# EAGLE board untitled (EAGLE 9.6.2)
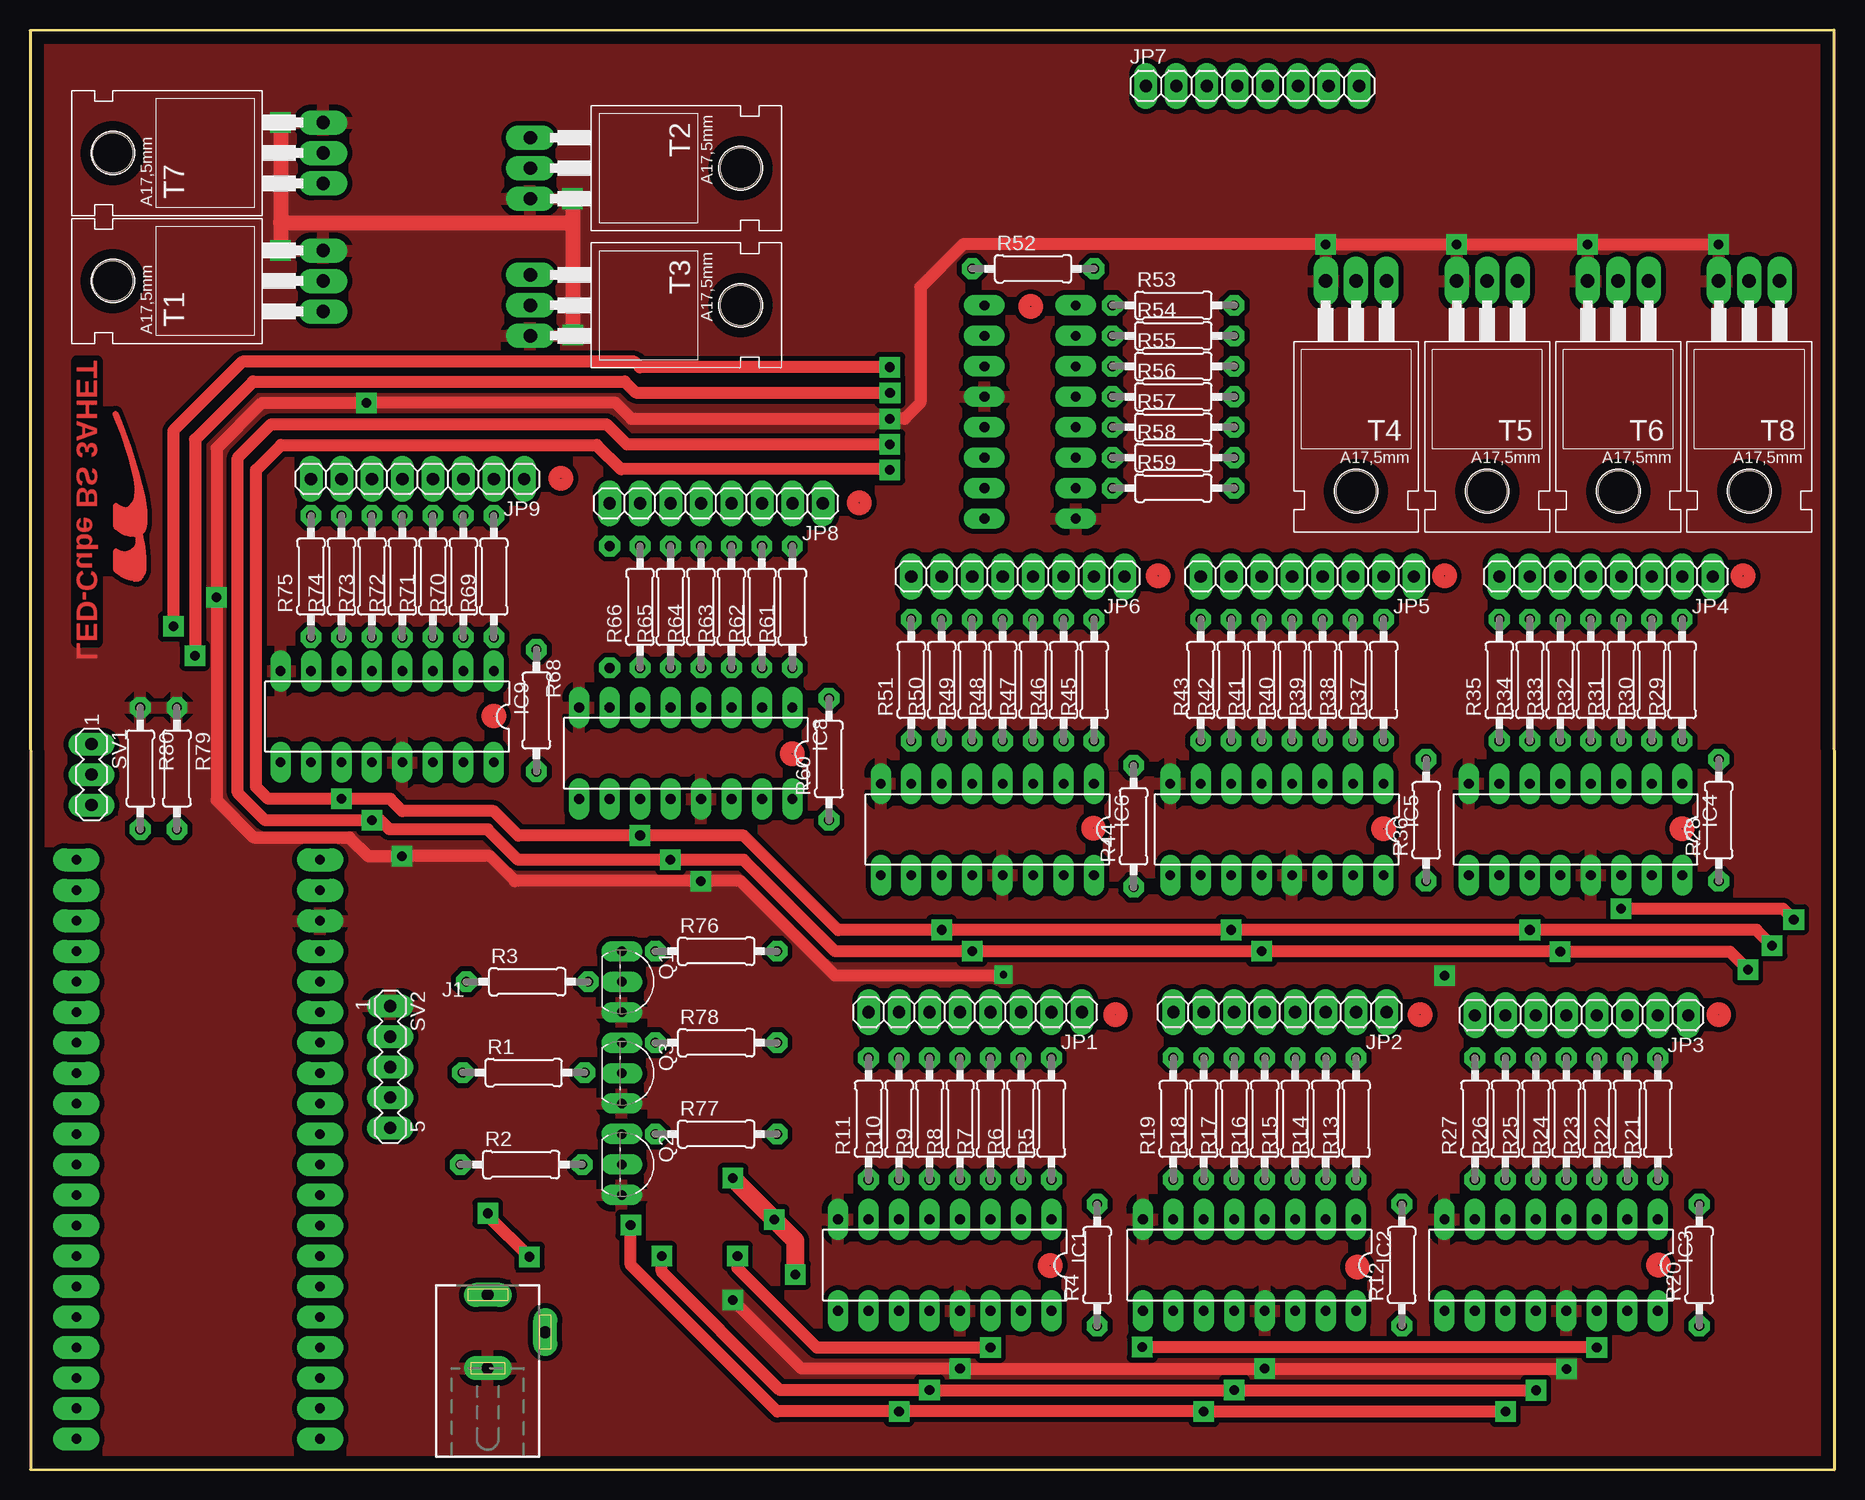
[diagram p0: board, top side]
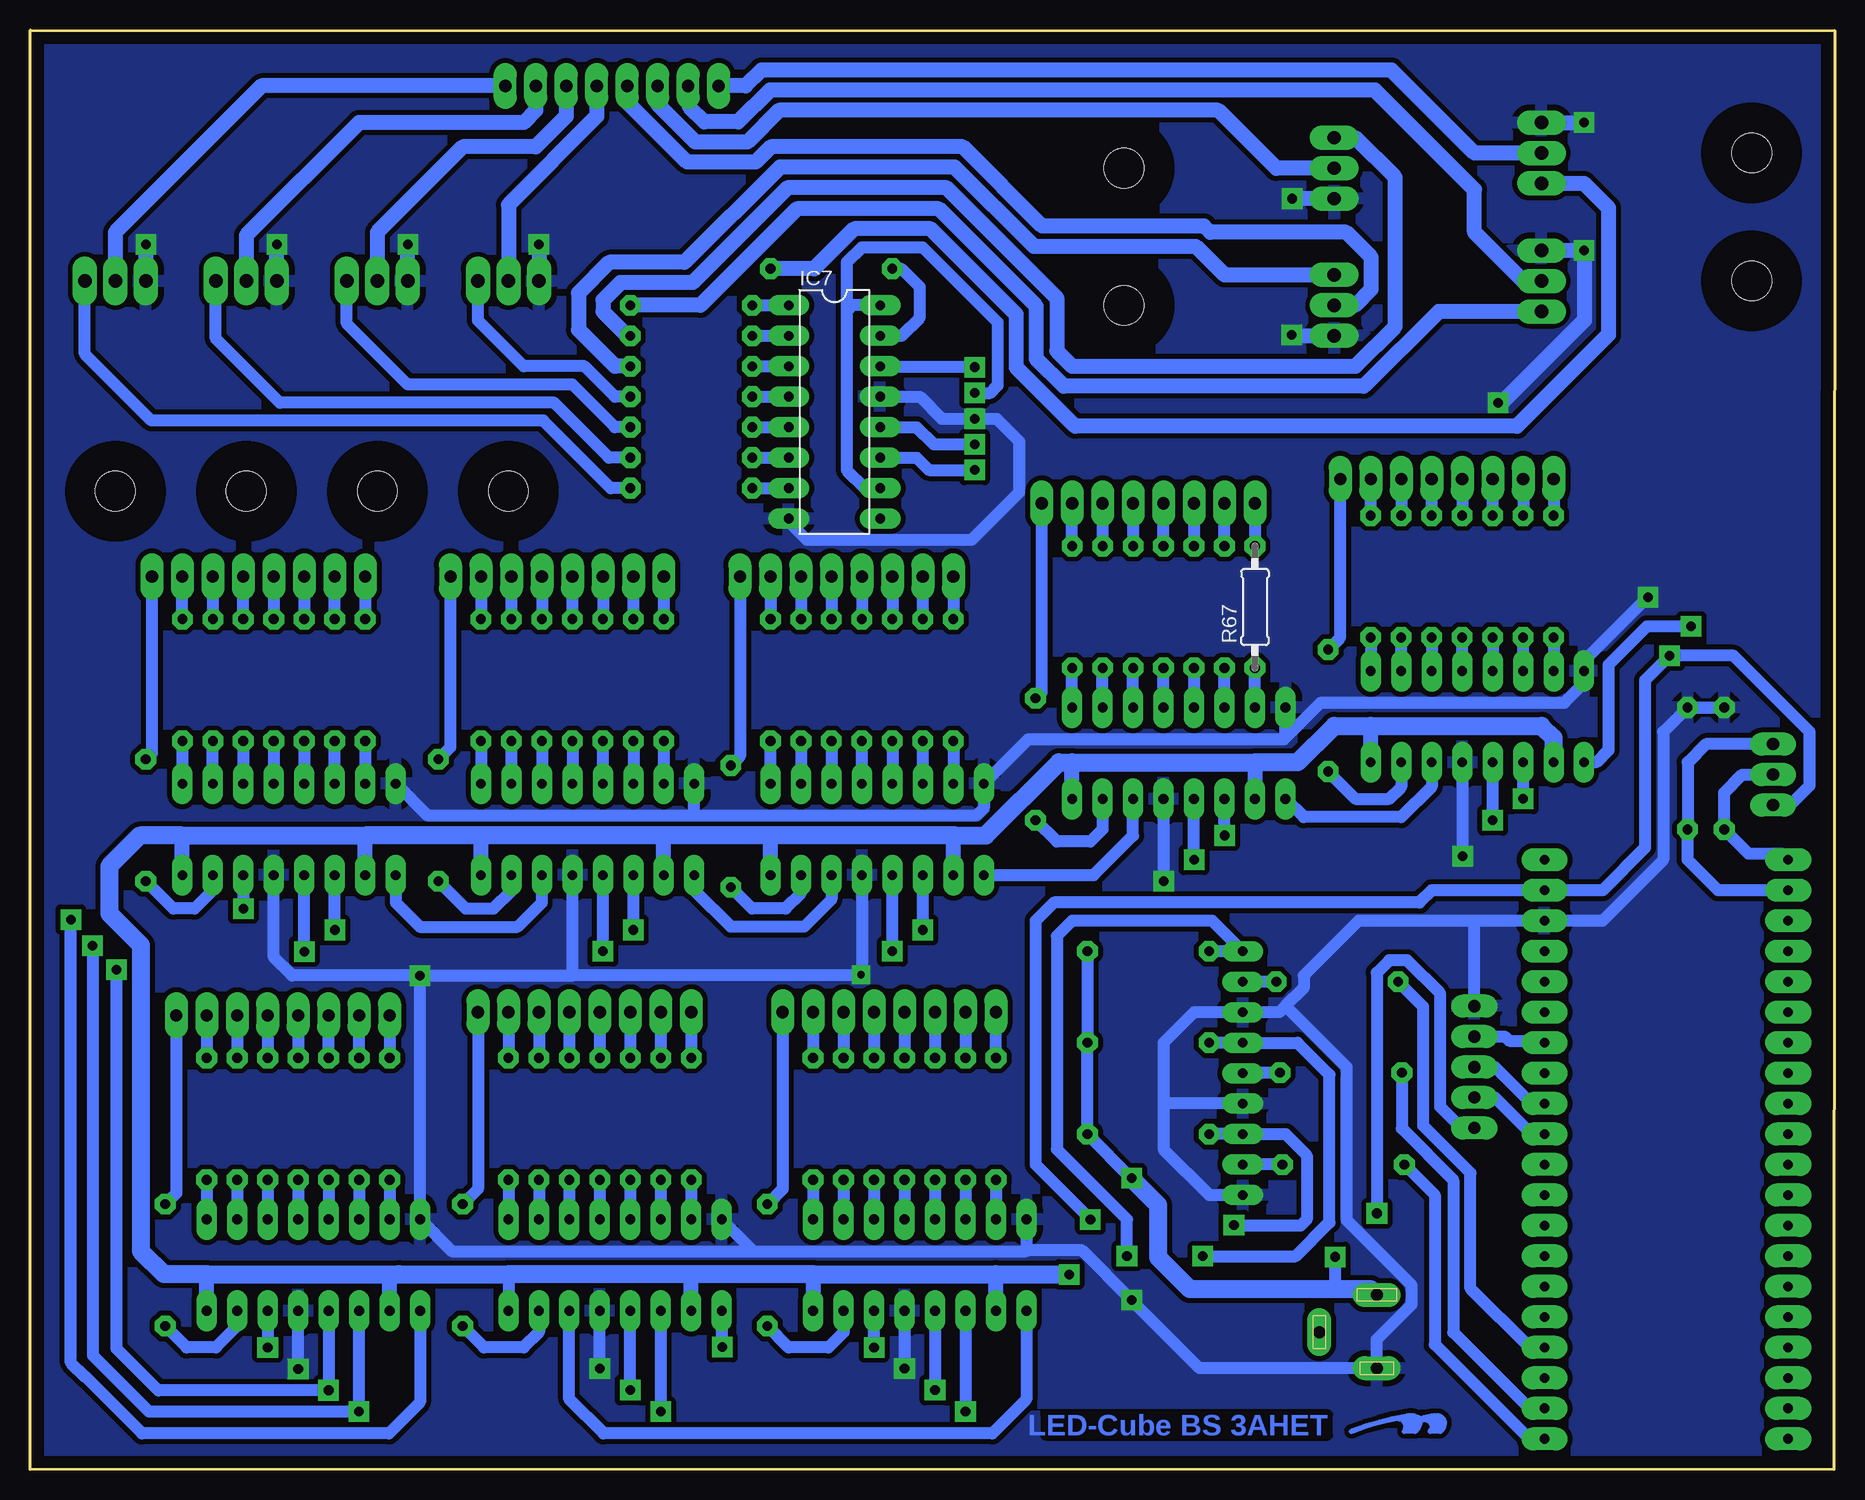
[diagram p1: board, bottom side, seen from below]

Size 150.42 x 120.01 mm. Coordinates in mm from the lower left corner, seen from the top.
Outline: 0.05,0.03 150.42,0 150.39,120.01 0,119.95 0.05,0.03
Copper layers (1*16): Top 0.035mm / dielectric 1.5mm / Bottom 0.035mm
Design rules "default *": minimum track width 16mil, minimum drill 24mil, track to track 16mil, track to pad 16mil, pad to pad 16mil, via to via 16mil, smd to smd 12mil, copper to edge 40mil, drill to drill 6mil, minimum pad ring 18mil, minimum via ring 18mil, stop-mask expansion 4mil, vias tented up to drill 0mil, thermal gap 20mil

## Footprints (pad centres in the part's own frame; a part is rotated, then mirrored left to right if it is on the bottom)
DIL16 = drill 0.813 long: 1 -8.89,-3.81; 2 -6.35,-3.81; 3 -3.81,-3.81; 4 -1.27,-3.81; 5 1.27,-3.81; 6 3.81,-3.81; 7 6.35,-3.81; 8 8.89,-3.81; 9 8.89,3.81; 10 6.35,3.81; 11 3.81,3.81; 12 1.27,3.81; 13 -1.27,3.81; 14 -3.81,3.81; 15 -6.35,3.81; 16 -8.89,3.81
DCJ0202 = drill 1 pad 2 long: 1 0,3.1; 2 4.8,0; 3 0,-3
1X08 = drill 1.016 long: 1 -8.89,0; 2 -6.35,0; 3 -3.81,0; 4 -1.27,0; 5 1.27,0; 6 3.81,0; 7 6.35,0; 8 8.89,0
TO92-EBC = drill 0.813 long: B 0,-1.27; C -2.54,-1.27; E 2.54,-1.27
0207/10 = drill 0.813 octagon: 1 -5.08,0; 2 5.08,0
MA03-1 = drill 1.016 long: 1 -2.54,0; 2 0,0; 3 2.54,0
MA05-1 = drill 1.016 long: 1 -5.08,0; 2 -2.54,0; 3 0,0; 4 2.54,0; 5 5.08,0
TO220 = drill 1.118 long: 1 -2.54,-6.35; 2 0,-6.35; 3 2.54,-6.35 | hole 3.302: 0,11.176
PI_PICO = drill 0.8 pad 1.93 long: 3V3(OUT) 10.16,15.24; 3V3_EN 10.16,17.78; ADC 10.16,12.7; GND1 -10.16,20.32; GND2 -10.16,7.62; GND3 -10.16,-5.08; GND4 -10.16,-17.78; GND5 10.16,-17.78; GND6 10.16,-5.08; GND7 10.16,7.62; GND8 10.16,20.32; GP0 -10.16,25.4; GP1 -10.16,22.86; GP2 -10.16,17.78; GP3 -10.16,15.24; GP4 -10.16,12.7; GP5 -10.16,10.16; GP6 -10.16,5.08; GP7 -10.16,2.54; GP8 -10.16,0; GP9 -10.16,-2.54; GP10 -10.16,-7.62; GP11 -10.16,-10.16; GP12 -10.16,-12.7; GP13 -10.16,-15.24; GP14 -10.16,-20.32; GP15 -10.16,-22.86; GP16 10.16,-22.86; GP17 10.16,-20.32; GP18 10.16,-15.24; GP19 10.16,-12.7; GP20 10.16,-10.16; GP21 10.16,-7.62; GP22 10.16,-2.54; GP26 10.16,2.54; GP27 10.16,5.08; GP28 10.16,10.16; RUN 10.16,0; VBUS 10.16,25.4; VSYS 10.16,22.86

## Placement (x,y rotation side)
IC1  74HC595N  [DIL16]  76.25,17.04 180 top
IC2  74HC595N  [DIL16]  101.65,17.04 180 top
IC3  74HC595N  [DIL16]  126.8,17.04 180 top
IC4  74HC595N  [DIL16]  128.83,53.37 180 top
IC5  74HC595N  [DIL16]  103.94,53.37 180 top
IC6  74HC595N  [DIL16]  79.81,53.37 180 top
IC7  74HC595N  [DIL16]  83.36,88.16 270 bottom
IC8  74HC595N  [DIL16]  54.66,59.72 180 top
IC9  74HC595N  [DIL16]  29.77,62.76 180 top
J1  DCJ0202  [DCJ0202]  38.15,11.46 0 top
JP1  [1X08]  78.79,38.13 180 top
JP2  [1X08]  104.19,38.13 180 top
JP3  [1X08]  129.34,37.87 180 top
JP4  [1X08]  131.37,74.45 180 top
JP5  [1X08]  106.48,74.45 180 top
JP6  [1X08]  82.35,74.45 180 top
JP7  [1X08]  101.9,115.34 0 top
JP8  [1X08]  57.2,80.54 180 top
JP9  [1X08]  32.31,82.58 180 top
Q1  BC447  [TO92-EBC]  50.6,40.67 270 top
Q2  BC447  [TO92-EBC]  50.6,25.43 270 top
Q3  BC447  [TO92-EBC]  50.6,33.05 270 top
R1  [0207/10]  41.15,33.1 0 top
R2  [0207/10]  40.94,25.43 0 top
R3  [0207/10]  41.45,40.67 0 top
R4  [0207/10]  88.95,17.04 90 top
R5  [0207/10]  85.14,29.24 90 top
R6  [0207/10]  82.6,29.24 90 top
R7  [0207/10]  80.06,29.24 90 top
R8  [0207/10]  77.52,29.24 90 top
R9  [0207/10]  74.98,29.24 90 top
R10  [0207/10]  72.44,29.24 90 top
R11  [0207/10]  69.9,29.24 90 top
R12  [0207/10]  114.35,17.04 90 top
R13  [0207/10]  110.54,29.24 90 top
R14  [0207/10]  108,29.24 90 top
R15  [0207/10]  105.46,29.24 90 top
R16  [0207/10]  102.92,29.24 90 top
R17  [0207/10]  100.38,29.24 90 top
R18  [0207/10]  97.84,29.24 90 top
R19  [0207/10]  95.3,29.24 90 top
R20  [0207/10]  139.14,17.04 90 top
R21  [0207/10]  135.69,29.24 90 top
R22  [0207/10]  133.15,29.24 90 top
R23  [0207/10]  130.61,29.24 90 top
R24  [0207/10]  128.07,29.24 90 top
R25  [0207/10]  125.53,29.24 90 top
R26  [0207/10]  122.99,29.24 90 top
R27  [0207/10]  120.45,29.24 90 top
R28  [0207/10]  140.77,54.13 90 top
R29  [0207/10]  137.72,65.81 90 top
R30  [0207/10]  135.18,65.81 90 top
R31  [0207/10]  132.64,65.81 90 top
R32  [0207/10]  130.1,65.81 90 top
R33  [0207/10]  127.56,65.81 90 top
R34  [0207/10]  125.02,65.81 90 top
R35  [0207/10]  122.48,65.81 90 top
R36  [0207/10]  116.38,54.13 90 top
R37  [0207/10]  112.83,65.81 90 top
R38  [0207/10]  110.29,65.81 90 top
R39  [0207/10]  107.75,65.81 90 top
R40  [0207/10]  105.21,65.81 90 top
R41  [0207/10]  102.67,65.81 90 top
R42  [0207/10]  100.13,65.81 90 top
R43  [0207/10]  97.59,65.81 90 top
R44  [0207/10]  92,53.62 90 top
R45  [0207/10]  88.7,65.81 90 top
R46  [0207/10]  86.16,65.81 90 top
R47  [0207/10]  83.62,65.81 90 top
R48  [0207/10]  81.08,65.81 90 top
R49  [0207/10]  78.54,65.81 90 top
R50  [0207/10]  76,65.81 90 top
R51  [0207/10]  73.46,65.81 90 top
R52  [0207/10]  83.62,100.1 0 top
R53  [0207/10]  95.3,97.05 0 top
R54  [0207/10]  95.3,94.51 0 top
R55  [0207/10]  95.3,91.97 0 top
R56  [0207/10]  95.3,89.43 0 top
R57  [0207/10]  95.3,86.89 0 top
R58  [0207/10]  95.3,84.35 0 top
R59  [0207/10]  95.3,81.81 0 top
R60  [0207/10]  66.6,59.21 90 top
R61  [0207/10]  63.55,71.91 90 top
R62  [0207/10]  61.01,71.91 90 top
R63  [0207/10]  58.47,71.91 90 top
R64  [0207/10]  55.93,71.91 90 top
R65  [0207/10]  53.39,71.91 90 top
R66  [0207/10]  50.85,71.91 90 top
R67  [0207/10]  48.31,71.91 90 bottom
R68  [0207/10]  42.21,63.27 90 top
R69  [0207/10]  38.66,74.45 90 top
R70  [0207/10]  36.12,74.45 90 top
R71  [0207/10]  33.58,74.45 90 top
R72  [0207/10]  31.04,74.45 90 top
R73  [0207/10]  28.5,74.45 90 top
R74  [0207/10]  25.96,74.45 90 top
R75  [0207/10]  23.42,74.45 90 top
R76  [0207/10]  57.2,43.21 0 top
R77  [0207/10]  57.2,27.97 0 top
R78  [0207/10]  57.2,35.59 0 top
R79  [0207/10]  12.24,58.45 270 top
R80  [0207/10]  9.19,58.45 270 top
SV1  [MA03-1]  5.13,57.94 270 top
SV2  [MA05-1]  30.02,33.55 270 top
T1  TIP122  [TO220]  18.08,99.09 90 top
T2  TIP122  [TO220]  48.06,108.48 270 top
T3  TIP122  [TO220]  48.06,97.05 270 top
T4  TIP122  [TO220]  110.54,92.74 180 top
T5  TIP122  [TO220]  121.46,92.74 180 top
T6  TIP122  [TO220]  132.38,92.74 180 top
T7  TIP122  [TO220]  18.08,109.75 90 top
T8  TIP122  [TO220]  143.31,92.74 180 top
U$1  [LOGOBOT_8]  36.63,3.07 0 top
U$2  [PI_PICO]  14.02,25.43 0 top
U$3  [LOGOTOP_15]  7.16,79.27 270 top

## Library data of the parts
IC1-IC9 = 74xx-eu
J1 = con-jack; OC_FARNELL: unknown; OC_NEWARK: unknown
JP1-JP9 = pinhead
Q1-Q3 = transistor-npn
R1-R80 = rcl; SPICEPREFIX: R
SV1 SV2 = con-lstb; OC_FARNELL: unknown; OC_NEWARK: unknown
T1-T8 = transistor
U$1 U$3 = HTL-Logo
U$2 = PI_PICO

## Nets
DATA: IC1.14 Q1.C R76.1
GND: IC1.8 IC1.13 IC2.8 IC2.13 IC3.8 IC3.13 IC4.8 IC4.13 IC5.8 IC5.13 IC6.8 IC6.13 IC7.8 IC7.13 IC8.8 IC8.13 IC9.8 IC9.13 J1.3 Q1.E Q2.E Q3.E R79.1 R80.1 SV2.1 T1.3 T2.3 T3.3 T4.3 T5.3 T6.3 T7.3 T8.3 U$2.GND8
N$1: R1.1 U$2.GP17
N$2: Q3.B R1.2
N$3: SV2.4 U$2.GP26
N$4: Q2.B R2.2
N$5: Q1.B R3.2
N$6: R3.1 U$2.GP18
N$7: R2.1 U$2.GP16
N$8: IC1.15 R4.1
N$9: IC1.5 R9.1
N$10: IC1.6 R10.1
N$11: IC1.7 R11.1
N$12: JP1.1 R4.2
N$13: JP1.2 R5.2
N$14: IC1.1 R5.1
N$15: IC1.2 R6.1
N$16: IC1.3 R7.1
N$17: IC1.4 R8.1
N$18: JP1.3 R6.2
N$19: JP1.4 R7.2
N$20: JP1.5 R8.2
N$21: JP1.6 R9.2
N$22: JP1.7 R10.2
N$23: JP1.8 R11.2
N$24: IC2.1 R13.1
N$25: IC2.2 R14.1
N$26: IC2.3 R15.1
N$27: IC2.4 R16.1
N$28: IC1.9 IC2.14
N$29: IC2.15 R12.1
N$30: IC2.5 R17.1
N$31: IC2.6 R18.1
N$32: IC2.7 R19.1
N$33: JP2.1 R12.2
N$34: JP2.2 R13.2
N$35: JP2.3 R14.2
N$36: JP2.4 R15.2
N$37: JP2.5 R16.2
N$38: JP2.6 R17.2
N$39: JP2.7 R18.2
N$40: JP2.8 R19.2
N$41: R80.2 SV1.2 U$2.GP0
N$42: IC2.9 IC3.14
N$43: R79.2 SV1.1 U$2.GP1
N$44: IC3.1 R21.1
N$45: IC3.2 R22.1
N$46: IC3.3 R23.1
N$47: IC3.4 R24.1
N$48: IC3.15 R20.1
N$49: IC3.5 R25.1
N$50: IC3.6 R26.1
N$51: IC3.7 R27.1
N$52: JP3.1 R20.2
N$53: JP3.2 R21.2
N$54: JP3.3 R22.2
N$55: JP3.4 R23.2
N$56: JP3.5 R24.2
N$57: JP3.6 R25.2
N$58: JP3.7 R26.2
N$59: JP3.8 R27.2
N$60: IC7.15 R52.1
N$61: IC3.9 IC4.14
N$62: IC7.1 R53.1
N$63: IC4.1 R29.1
N$64: IC4.2 R30.1
N$65: IC4.3 R31.1
N$66: IC4.4 R32.1
N$67: IC4.15 R28.1
N$68: IC4.5 R33.1
N$69: IC4.6 R34.1
N$70: IC4.7 R35.1
N$71: JP4.1 R28.2
N$72: JP4.2 R29.2
N$73: JP4.3 R30.2
N$74: JP4.4 R31.2
N$75: JP4.5 R32.2
N$76: JP4.6 R33.2
N$77: JP4.7 R34.2
N$78: JP4.8 R35.2
N$79: IC7.2 R54.1
N$80: IC4.9 IC5.14
N$81: IC7.3 R55.1
N$82: IC5.1 R37.1
N$83: IC5.2 R38.1
N$84: IC5.3 R39.1
N$85: IC5.4 R40.1
N$86: IC5.15 R36.1
N$87: IC5.5 R41.1
N$88: IC5.6 R42.1
N$89: IC5.7 R43.1
N$90: JP5.1 R36.2
N$91: JP5.2 R37.2
N$92: JP5.3 R38.2
N$93: JP5.4 R39.2
N$94: JP5.5 R40.2
N$95: JP5.6 R41.2
N$96: JP5.7 R42.2
N$97: JP5.8 R43.2
N$98: IC7.4 R56.1
N$99: IC5.9 IC6.14
N$100: IC7.5 R57.1
N$101: IC6.1 R45.1
N$102: IC6.2 R46.1
N$103: IC6.3 R47.1
N$104: IC6.4 R48.1
N$105: IC6.15 R44.1
N$106: IC6.5 R49.1
N$107: IC6.6 R50.1
N$108: IC6.7 R51.1
N$109: JP6.1 R44.2
N$110: JP6.2 R45.2
N$111: JP6.3 R46.2
N$112: JP6.4 R47.2
N$113: JP6.5 R48.2
N$114: JP6.6 R49.2
N$115: JP6.7 R50.2
N$116: JP6.8 R51.2
N$117: IC7.6 R58.1
N$118: SV2.3 U$2.GP27
N$119: IC7.7 R59.1
N$120: R52.2 T7.1
N$121: R53.2 T1.1
N$122: R54.2 T2.1
N$123: R55.2 T3.1
N$124: R56.2 T4.1
N$125: R57.2 T5.1
N$126: R58.2 T6.1
N$127: R59.2 T8.1
N$128: JP7.1 T7.2
N$129: JP7.2 T1.2
N$130: JP7.3 T2.2
N$131: JP7.4 T3.2
N$132: JP7.5 T4.2
N$133: JP7.6 T5.2
N$134: JP7.7 T6.2
N$135: JP7.8 T8.2
N$136: IC6.9 IC8.14
N$137: IC8.1 R61.1
N$138: IC8.2 R62.1
N$139: IC8.3 R63.1
N$140: IC8.4 R64.1
N$141: IC8.15 R60.1
N$142: IC8.5 R65.1
N$143: IC8.6 R66.1
N$144: IC8.7 R67.1
N$145: JP8.1 R60.2
N$146: JP8.2 R61.2
N$147: JP8.3 R62.2
N$148: JP8.4 R63.2
N$149: JP8.5 R64.2
N$150: JP8.6 R65.2
N$151: JP8.7 R66.2
N$152: JP8.8 R67.2
N$153: SV2.2 U$2.GP28
N$154: IC8.9 IC9.14
N$155: IC9.1 R69.1
N$156: IC9.2 R70.1
N$157: IC9.3 R71.1
N$158: IC9.4 R72.1
N$159: IC9.15 R68.1
N$160: IC9.5 R73.1
N$161: IC9.6 R74.1
N$162: IC9.7 R75.1
N$163: JP9.1 R68.2
N$164: JP9.2 R69.2
N$165: JP9.3 R70.2
N$166: JP9.4 R71.2
N$167: JP9.5 R72.2
N$168: JP9.6 R73.2
N$169: JP9.7 R74.2
N$170: JP9.8 R75.2
N$173: IC7.14 IC9.9
SHIFT: IC1.11 IC2.11 IC3.11 IC4.11 IC5.11 IC6.11 IC7.11 IC8.11 IC9.11 Q2.C R77.1
STORE: IC1.12 IC2.12 IC3.12 IC4.12 IC5.12 IC6.12 IC7.12 IC8.12 IC9.12 Q3.C R78.1
VCC: IC1.10 IC1.16 IC2.10 IC2.16 IC3.10 IC3.16 IC4.10 IC4.16 IC5.10 IC5.16 IC6.10 IC6.16 IC7.10 IC7.16 IC8.10 IC8.16 IC9.10 IC9.16 J1.1 R76.2 R77.2 R78.2 SV1.3 SV2.5 U$2.VSYS

## Tracks (layer width: path | path; a pad name or v marks a point on that pad's centre or on a via)
DATA  (via drill 0.8)
  Top 1.016: v58.98,17.81 58.98,16.79 65.58,10.19 v80.06,10.19
  Bottom 1.016: R76.1 Q1.C 51.87,45.75 63.55,45.75 64.82,44.48 64.82,26.7 58.98,20.85 v58.98,17.81 | v80.06,10.19 IC1.14
GND  (via drill 0.61, 0.8)
  Top 1.016: v58.6,14.12 64.31,8.41 v77.52,8.41 v102.92,8.41 128.04,8.41 v128.07,8.38 | v140.75,102.11 v129.84,102.11 v118.92,102.11 108.02,102.11 | v108,102.13 77.77,102.13 74.22,98.58 74.22,88.93 72.9,87.6 v71.68,87.6 50.14,87.6 48.82,88.93 v28.04,88.93 19.35,88.93 15.54,85.12 v15.54,72.72 15.54,55.8 18.64,52.71 26.62,52.71 28.19,51.13 v30.99,51.13 38.35,51.13 40.44,49.05 v55.93,49.05 59.23,49.05 67.11,41.17 81.08,41.17 v81.15,41.24
  Top 1.27: 108.02,102.11 v108,102.13 | v20.88,112.29 20.88,103.96 | 20.88,103.96 v20.88,101.63 | 45.24,103.96 45.24,94.61 v45.26,94.59 | 20.88,103.96 45.24,103.96 | v45.21,105.94 45.24,105.92 45.24,103.96
  Bottom 1.016: 55.93,30.51 55.93,35.59 53.39,38.13 Q1.E 46.28,38.13 45.77,38.63 | 55.93,30.51 55.93,26.7 52.12,22.89 Q2.E | Q3.E 55.93,30.51 | IC2.8 90.12,18.21 | 90.12,18.21 67.36,18.21 67.36,18.31 | 67.36,18.31 62.79,18.31 v58.6,14.12 52.93,8.46 J1.3 38.15,10.85 35.24,13.76 35.24,15.35 40.67,20.78 40.67,33.53 45.77,38.63 | IC1.8 67.36,18.31 | IC1.13 v77.52,8.41 | v102.92,8.41 IC2.13 | v128.07,8.38 IC3.13 | 90.12,18.21 115.26,18.21 IC3.8 v117.91,41.17 | v117.91,41.17 128.57,41.17 130.1,42.7 IC4.13 | 105.21,41.17 IC5.13 | IC4.8 117.3,54.53 95.4,54.53 | IC5.8 95.05,54.89 95.4,54.53 | IC6.13 81.08,41.17 | 95.4,54.53 71.53,54.53 70.92,55.14 IC6.8 67.21,60.88 45.87,60.88 45.77,60.99 | IC8.13 v55.93,49.05 | 45.77,60.99 IC8.8 | R80.1 R79.1 14.27,61.49 14.27,50.83 19.35,45.75 U$2.GND8 30.02,45.75 | 45.77,60.99 42.82,63.93 22.5,63.93 20.88,65.56 IC9.8 20.88,67.39 v15.54,72.72 | IC7.13 76.25,89.43 74.42,87.6 v71.68,87.6 69.85,87.6 67.97,85.73 67.97,81.46 71.93,77.5 85.65,77.5 87.17,79.02 IC7.8 | IC9.13 31.04,51.18 v30.99,51.13 | v117.91,41.17 105.21,41.17 | 81.08,41.17 105.21,41.17 | v81.15,41.24 81.08,41.17 | 30.02,45.75 39.67,45.75 44.25,41.17 44.25,40.16 45.77,38.63 | SV2.1 30.02,45.75
  Bottom 1.27: T8.3 140.75,99.1 v140.75,102.11 | v108,102.13 T4.3 | T5.3 v118.92,102.11 | T6.3 v129.84,102.11 | T7.3 v20.88,112.29 | T1.3 v20.88,101.63 20.85,101.6 20.85,95.82 27.89,88.78 v28.04,88.93 | v45.26,94.59 45.19,94.51 T3.3 | T2.3 v45.21,105.94
  pour Bottom: 0.56,118.9 149.91,118.9 149.91,0.53 0.56,0.53
  pour Top: 0.56,118.9 149.91,118.9 149.91,0.53 0.56,0.53
N$1
  Bottom 1.016: U$2.GP17 25.45,5.11 31.78,11.43 31.78,24.13 36.07,28.42 R1.1
N$2
  Bottom 1.016: Q3.B 47.8,33.05 47.75,33.1 R1.2
N$3
  Bottom 1.016: U$2.GP26 24.33,28.12 25.42,28.12 28.31,31.01 SV2.4
N$4
  Bottom 1.016: R2.2 Q2.B
N$5
  Bottom 1.016: R3.2 Q1.B
N$6
  Bottom 1.016: U$2.GP18 25.45,10.19 30.35,15.09 30.35,24.72 34.29,28.66 34.29,38.58 R3.1
N$7
  Bottom 1.016: U$2.GP16 25.45,2.57 33.32,10.44 33.32,22.89 R2.1
N$8
  Bottom 1.016: IC1.15 82.6,11.46 83.87,10.19 87.17,10.19 R4.1
N$9
  Bottom 1.016: R9.1 IC1.5
N$10
  Bottom 1.016: R10.1 IC1.6
N$11
  Bottom 1.016: R11.1 IC1.7
N$12
  Bottom 1.016: JP1.1 87.68,23.39 R4.2
N$13
  Bottom 1.016: JP1.2 R5.2
N$14
  Bottom 1.016: R5.1 IC1.1
N$15
  Bottom 1.016: R6.1 IC1.2
N$16
  Bottom 1.016: R7.1 IC1.3
N$17
  Bottom 1.016: R8.1 IC1.4
N$18
  Bottom 1.016: JP1.3 R6.2
N$19
  Bottom 1.016: JP1.4 R7.2
N$20
  Bottom 1.016: JP1.5 R8.2
N$21
  Bottom 1.016: JP1.6 R9.2
N$22
  Bottom 1.016: JP1.7 R10.2
N$23
  Bottom 1.016: R11.2 JP1.8
N$24
  Bottom 1.016: R13.1 IC2.1
N$25
  Bottom 1.016: R14.1 IC2.2
N$26
  Bottom 1.016: R15.1 IC2.3
N$27
  Bottom 1.016: R16.1 IC2.4
N$28
  Bottom 1.016: IC1.9 67.36,5.87 70.21,3.02 102.62,3.02 105.46,5.87 IC2.14
N$29
  Bottom 1.016: IC2.15 108,11.46 109.27,10.19 112.57,10.19 R12.1
N$30
  Bottom 1.016: R17.1 IC2.5
N$31
  Bottom 1.016: R18.1 IC2.6
N$32
  Bottom 1.016: R19.1 IC2.7
N$33
  Bottom 1.016: JP2.1 113.08,23.39 R12.2
N$34
  Bottom 1.016: JP2.2 R13.2
N$35
  Bottom 1.016: JP2.3 R14.2
N$36
  Bottom 1.016: JP2.4 R15.2
N$37
  Bottom 1.016: JP2.5 R16.2
N$38
  Bottom 1.016: JP2.6 R17.2
N$39
  Bottom 1.016: JP2.7 R18.2
N$40
  Bottom 1.016: JP2.8 R19.2
N$41
  Bottom 1.016: U$2.GP0 4.37,51.33 7.16,51.33 R80.2 9.19,56.41 7.67,57.94 SV1.2
N$42  (via drill 0.8)
  Top 1.016: v92.71,10.21 92.73,10.19 v130.61,10.19
  Bottom 1.016: IC2.9 92.76,10.26 v92.71,10.21 | IC3.14 v130.61,10.19
N$43
  Bottom 1.016: U$2.GP1 9.7,48.29 12.24,50.83 R79.2 12.24,58.95 10.72,60.48 SV1.1
N$44
  Bottom 1.016: R21.1 IC3.1
N$45
  Bottom 1.016: R22.1 IC3.2
N$46
  Bottom 1.016: R23.1 IC3.3
N$47
  Bottom 1.016: R24.1 IC3.4
N$48
  Bottom 1.016: IC3.15 133.15,11.96 134.92,10.19 137.36,10.19 R20.1
N$49
  Bottom 1.016: R25.1 IC3.5
N$50
  Bottom 1.016: R26.1 IC3.6
N$51
  Bottom 1.016: R27.1 IC3.7
N$52
  Bottom 1.016: JP3.1 138.23,23.04 R20.2
N$53
  Bottom 1.016: JP3.2 R21.2
N$54
  Bottom 1.016: JP3.3 R22.2
N$55
  Bottom 1.016: JP3.4 R23.2
N$56
  Bottom 1.016: JP3.5 R24.2
N$57
  Bottom 1.016: R25.2 JP3.6
N$58
  Bottom 1.016: R26.2 JP3.7
N$59
  Bottom 1.016: JP3.8 R27.2
N$60
  Bottom 1.016: IC7.15 77.77,94.51 76.25,96.04 76.25,98.58 77.77,100.1 R52.1
N$61  (via drill 0.8)
  Top 1.016: v147.02,45.85 146.1,46.76 v132.64,46.76
  Bottom 1.016: IC3.9 117.91,5.61 120.5,3.02 141.08,3.02 145.86,7.8 145.86,7.76 147.02,8.92 v147.02,45.85 | IC4.14 v132.64,46.76
N$62
  Bottom 1.016: R53.1 IC7.1
N$63
  Bottom 1.016: R29.1 IC4.1
N$64
  Bottom 1.016: IC4.2 R30.1
N$65
  Bottom 1.016: R31.1 IC4.3
N$66
  Bottom 1.016: R32.1 IC4.4
N$67
  Bottom 1.016: IC4.15 135.18,48.29 136.7,46.76 138.48,46.76 R28.1
N$68
  Bottom 1.016: R33.1 IC4.5
N$69
  Bottom 1.016: IC4.6 R34.1
N$70
  Bottom 1.016: R35.1 IC4.7
N$71
  Bottom 1.016: JP4.1 140.26,59.72 R28.2
N$72
  Bottom 1.016: R29.2 JP4.2
N$73
  Bottom 1.016: JP4.3 R30.2
N$74
  Bottom 1.016: R31.2 JP4.4
N$75
  Bottom 1.016: JP4.5 R32.2
N$76
  Bottom 1.016: JP4.6 R33.2
N$77
  Bottom 1.016: R34.2 JP4.7
N$78
  Bottom 1.016: JP4.8 R35.2
N$79
  Bottom 1.016: R54.1 IC7.2
N$80
  Bottom 1.016: IC4.9 119.94,47.27 117.91,45.24 109.78,45.24 107.75,47.27 IC5.14
N$81
  Bottom 1.016: R55.1 IC7.3
N$82
  Bottom 1.016: R37.1 IC5.1
N$83
  Bottom 1.016: IC5.2 R38.1
N$84
  Bottom 1.016: R39.1 IC5.3
N$85
  Bottom 1.016: R40.1 IC5.4
N$86
  Bottom 1.016: R36.1 114.1,46.76 111.81,46.76 110.29,48.29 IC5.15
N$87
  Bottom 1.016: IC5.5 R41.1
N$88
  Bottom 1.016: R42.1 IC5.6
N$89
  Bottom 1.016: R43.1 IC5.7
N$90
  Bottom 1.016: R36.2 115.37,60.22 JP5.1
N$91
  Bottom 1.016: JP5.2 R37.2
N$92
  Bottom 1.016: R38.2 JP5.3
N$93
  Bottom 1.016: JP5.4 R39.2
N$94
  Bottom 1.016: R40.2 JP5.5
N$95
  Bottom 1.016: JP5.6 R41.2
N$96
  Bottom 1.016: R42.2 JP5.7
N$97
  Bottom 1.016: JP5.8 R43.2
N$98
  Bottom 1.016: R56.1 IC7.4
N$99
  Bottom 1.016: IC6.14 83.62,47.52 85.9,45.24 92,45.24 95.05,48.29 IC5.9
N$100
  Bottom 1.016: R57.1 IC7.5
N$101
  Bottom 1.016: IC6.1 R45.1
N$102
  Bottom 1.016: R46.1 IC6.2
N$103
  Bottom 1.016: R47.1 IC6.3
N$104
  Bottom 1.016: IC6.4 R48.1
N$105
  Bottom 1.016: R44.1 90.22,46.76 87.43,46.76 86.16,48.03 IC6.15
N$106
  Bottom 1.016: R49.1 IC6.5
N$107
  Bottom 1.016: IC6.6 R50.1
N$108
  Bottom 1.016: R51.1 IC6.7
N$109
  Bottom 1.016: JP6.1 91.24,59.46 R44.2
N$110
  Bottom 1.016: JP6.2 R45.2
N$111
  Bottom 1.016: JP6.3 R46.2
N$112
  Bottom 1.016: JP6.4 R47.2
N$113
  Bottom 1.016: JP6.5 R48.2
N$114
  Bottom 1.016: JP6.6 R49.2
N$115
  Bottom 1.016: R50.2 JP6.7
N$116
  Bottom 1.016: JP6.8 R51.2
N$117
  Bottom 1.016: R58.1 IC7.6
N$118
  Bottom 1.016: U$2.GP27 24.33,30.66 25.42,30.66 28.31,33.55 SV2.3
N$119
  Bottom 1.016: R59.1 IC7.7
N$120
  Bottom 1.27: T7.1 20.88,107.21 18.85,105.18 18.85,94.59 26.47,86.97 63.3,86.97 68.2,91.87 68.2,96.28 75.35,103.43 81.72,103.43 85.05,100.1 R52.2
N$121
  Bottom 1.27: T1.1 32.99,96.55 39.24,90.3 64.24,90.3 66.53,92.58 66.53,96.97 74.66,105.11 86.49,105.11 94.54,97.05 R53.2
N$122
  Bottom 1.27: R54.2 100.63,94.51 102.67,96.55 102.67,97.49 101.2,98.96 95.17,98.96 87.27,106.86 74.02,106.86 64.82,97.66 64.82,93.24 63.55,91.97 39.94,91.97 36.63,95.28 36.63,107.72 39.93,111.02 T2.1
N$123
  Bottom 1.27: R55.2 101.65,91.97 104.7,95.02 104.7,98.07 102.13,100.63 95.87,100.63 87.92,108.59 73.35,108.59 66.75,101.98 53.24,101.98 50.85,99.59 T3.1
N$124
  Bottom 1.016: R56.2 101.65,89.43 104.19,91.97 109.27,91.97 113.08,95.78 T4.1
N$125
  Bottom 1.016: R57.2 101.65,86.89 105.21,90.45 118.92,90.45 124,95.53 T5.1
N$126
  Bottom 1.016: R58.2 102.16,84.35 106.73,88.93 129.59,88.93 134.92,94.26 T6.1
N$127
  Bottom 1.016: R59.2 102.01,81.81 107.64,87.45 140.31,87.45 145.85,92.99 T8.1
N$128
  Bottom 1.27: T7.2 30.02,109.75 36.93,116.66 89.44,116.66 90.76,115.34 JP7.1
N$129
  Bottom 1.27: JP7.2 95.48,115.27 95.48,113.62 94.21,112.34 91.39,112.34 88.75,114.99 38.3,114.99 30.02,106.71 30.02,103.15 25.96,99.09 T1.2
N$130
  Bottom 1.27: JP7.3 98.09,113.82 94.94,110.67 90.63,110.67 87.99,113.31 51.36,113.31 46.53,108.48 T2.2
N$131
  Bottom 1.27: T3.2 41.68,97.08 39.91,97.08 38.61,98.38 38.61,101.07 40.69,103.15 52.04,103.15 52.54,103.66 66.06,103.66 72.66,110.26 88.66,110.26 89.93,108.99 95.64,108.99 100.63,113.99 JP7.4
N$132
  Bottom 1.27: JP7.5 103.17,112.8 110.54,105.44 T4.2
N$133
  Bottom 1.27: JP7.6 105.71,112.8 108.25,110.26 114.35,110.26 121.46,103.15 T5.2
N$134
  Bottom 1.27: JP7.7 108.25,113.31 109.27,112.29 122.99,112.29 132.38,102.9 T6.2
N$135
  Bottom 1.27: JP7.8 131.11,115.34 143.31,103.15 T8.2
N$136
  Bottom 1.016: IC6.9 61.77,49.56 58.47,52.86 IC8.14
N$137
  Bottom 1.016: IC8.1 R61.1
N$138
  Bottom 1.016: IC8.2 R62.1
N$139
  Bottom 1.016: IC8.3 R63.1
N$140
  Bottom 1.016: IC8.4 R64.1
N$141
  Bottom 1.016: IC8.15 61.01,53.37 62.03,52.35 64.82,52.35 R60.1
N$142
  Bottom 1.016: R65.1 IC8.5
N$143
  Bottom 1.016: IC8.6 R66.1
N$144
  Bottom 1.016: IC8.7 R67.1
N$145
  Bottom 1.016: JP8.1 66.09,64.8 R60.2
N$146
  Bottom 1.016: R61.2 JP8.2
N$147
  Bottom 1.016: JP8.3 R62.2
N$148
  Bottom 1.016: JP8.4 R63.2
N$149
  Bottom 1.016: R64.2 JP8.5
N$150
  Bottom 1.016: JP8.6 R65.2
N$151
  Bottom 1.016: R66.2 JP8.7
N$152
  Bottom 1.016: JP8.8 R67.2
N$153
  Bottom 1.016: U$2.GP28 24.33,35.74 27.13,35.74 27.48,36.09 SV2.2
N$154
  Bottom 1.016: IC9.14 33.58,56.92 36.12,54.38 44.25,54.38 IC8.9
N$155
  Bottom 1.016: R69.1 IC9.1
N$156
  Bottom 1.016: IC9.2 R70.1
N$157
  Bottom 1.016: R71.1 IC9.3
N$158
  Bottom 1.016: IC9.4 R72.1
N$159
  Bottom 1.016: IC9.15 36.12,56.92 37.13,55.91 39.93,55.91 R68.1
N$160
  Bottom 1.016: R73.1 IC9.5
N$161
  Bottom 1.016: IC9.6 R74.1
N$162
  Bottom 1.016: R75.1 IC9.7
N$163
  Bottom 1.016: R68.2 41.2,69.37 JP9.1
N$164
  Bottom 1.016: R69.2 JP9.2
N$165
  Bottom 1.016: JP9.3 R70.2
N$166
  Bottom 1.016: R71.2 JP9.4
N$167
  Bottom 1.016: JP9.5 R72.2
N$168
  Bottom 1.016: R73.2 JP9.6
N$169
  Bottom 1.016: JP9.7 R74.2
N$170
  Bottom 1.016: JP9.8 R75.2
N$173  (via drill 0.8)
  Top 1.016: v71.68,91.9 50.85,91.9 50.39,92.35 17.7,92.35 11.95,86.6 v11.95,70.28
  Bottom 1.016: IC7.14 79.53,91.95 71.68,91.95 v71.68,91.9 | v11.95,70.28 15.65,70.28 18.85,67.08 18.85,59.97 19.86,58.95 IC9.9
SHIFT  (via drill 0.8, 0.8 pad 0.8)
  Top 1.016: v50.07,20.38 50.07,17.07 62.28,4.85 v72.44,4.85 72.49,4.85 72.5,4.86 97.81,4.86 v97.84,4.82 v122.98,4.82 v122.99,4.83 | v145.21,43.68 143.9,44.99 v125.02,44.99 v125.02,44.98 v100.13,44.98 v76,44.98 67.36,44.98 59.49,52.86 v50.85,52.86 40.69,52.86 38.66,54.89 31.04,54.89 30.02,55.91 v25.96,55.91 19.86,55.91 18.85,56.92 18.85,83.34 20.93,85.42 47.24,85.42 49.28,83.39 71.63,83.39 v71.68,83.34
  Bottom 1.016: R77.1 Q2.C 45.77,27.97 43.99,26.19 43.99,20.85 44.5,20.35 50.07,20.35 v50.07,20.38 | IC1.11 v72.44,4.85 | IC2.11 v97.84,4.82 | IC3.11 v122.99,4.83 140.49,4.83 145.18,9.52 145.18,43.65 v145.21,43.68 | v125.02,44.98 IC4.11 | v100.13,44.98 IC5.11 | v76,44.98 IC6.11 | v50.85,52.86 IC8.11 | v25.96,55.91 IC9.11 | IC7.11 76.5,84.35 75.49,83.34 v71.68,83.34
STORE  (via drill 0.8)
  Top 1.016: v52.66,17.78 52.66,16.51 62.53,6.63 v74.98,6.63 v100.38,6.63 125.5,6.63 v125.53,6.61 | v143.2,41.68 141.71,43.18 v127.56,43.18 102.69,43.18 v102.67,43.21 v78.54,43.21 67.11,43.21 59.49,50.83 v53.39,50.83 40.69,50.83 38.15,53.37 29.97,53.37 29.21,54.13 v28.5,54.13 19.61,54.13 17.32,56.41 17.32,84.35 20.12,87.15 48.06,87.15 49.73,85.47 v71.68,85.47
  Bottom 1.016: R78.1 Q3.C 44.75,35.59 42.09,32.92 42.09,20.6 44.9,17.78 v52.66,17.78 | IC1.12 v74.98,6.63 | v100.38,6.63 IC2.12 | IC3.12 v125.53,6.61 139.73,6.61 143.2,10.08 v143.2,41.68 | IC4.12 127.61,49.5 127.61,43.23 v127.56,43.18 | v102.67,43.21 IC5.12 | v78.54,43.21 IC6.12 | v53.39,50.83 53.44,50.88 53.44,55.85 IC8.12 | v28.5,54.13 IC9.12 | v71.68,85.47 75.08,85.47 76.5,86.89 IC7.12
VCC  (via drill 0.8, 0.8 pad 0.8)
  Top 1.016: v71.68,89.75 71.65,89.79 50.49,89.79 49.58,90.7 18.59,90.7 13.77,85.88 13.77,67.87 v13.74,67.84 | v38.15,21.36 38.15,21.21 v41.63,17.73
  Top 1.5: v63.8,16.26 63.8,19.08 v62.03,20.85 v58.6,24.28
  Bottom 1.016: R76.2 R78.2 R77.2 v58.6,24.28 | 110.54,16.28 IC2.16 | 63.83,16.28 v63.8,16.26 | 120.45,15.52 119.68,16.28 | v62.03,20.85 66.6,25.43 66.6,45.75 65.07,47.27 34.59,47.27 33.58,48.29 U$2.VSYS 19.35,48.29 15.8,51.84 15.8,65.79 v13.74,67.84 8.43,67.84 2.08,61.49 2.08,57.01 3.69,55.4 SV1.3 | IC7.16 81.84,97.05 82.35,96.55 | 82.35,96.55 82.35,83.34 80.82,81.81 IC7.10 | v71.68,89.75 70.36,89.75 69.75,90.36 69.75,95.64 76,101.88 81.08,101.88 82.35,100.61 82.35,96.55 | SV2.5 31.11,28.47 32.87,30.23 32.87,39.67 35.64,42.44 37.11,42.44 38.15,41.4 v38.15,21.36 | v41.63,17.73 41.63,15.14 41.71,15.06
  Bottom 1.27: 85.14,16.28 IC1.16 | IC2.10 95.3,16.28 | IC1.10 69.9,16.28 | IC3.10 120.45,15.52 | IC3.16 135.69,16.28 | IC4.16 137.72,52.86 | IC4.10 122.48,52.86 | IC5.10 97.59,52.86 | IC5.16 112.83,52.86 | IC6.10 73.46,52.6 73.2,52.86 | IC6.16 88.7,52.6 88.95,52.86 | 48.31,58.95 IC8.10 | IC8.16 63.55,58.95 | IC9.16 38.66,62
  Bottom 1.5: v58.6,24.28 56.36,22.04 56.36,17.67 53.75,15.06 41.71,15.06 38.66,15.06 J1.1 | 63.83,16.28 69.9,16.28 85.14,16.28 95.3,16.28 110.54,16.28 119.68,16.28 135.69,16.28 139.24,16.28 141.17,18.21 141.17,43.71 143.81,46.36 143.81,50.32 141.27,52.86 137.72,52.86 122.48,52.86 112.83,52.86 97.59,52.86 88.95,52.86 73.2,52.86 70.76,52.86 64.67,58.95 63.55,58.95 48.31,58.95 44.75,58.95 41.71,62 38.66,62 24.43,62 23.42,60.99 IC9.10
(copper drawn outside any net)
  shapes: Top circle x17

## Text on the board
Top: LED-Cube BS 3AHET
Bottom: LED-Cube BS 3AHET